# EAGLE board dc_adapter (EAGLE 6.2)
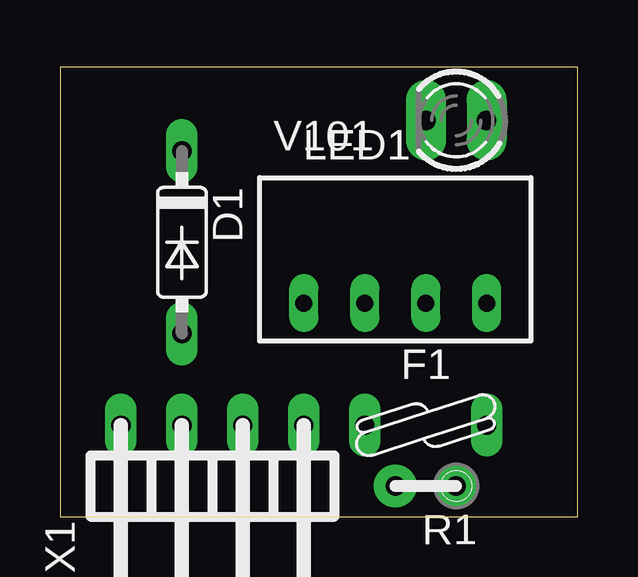
[diagram p0: board, top side]
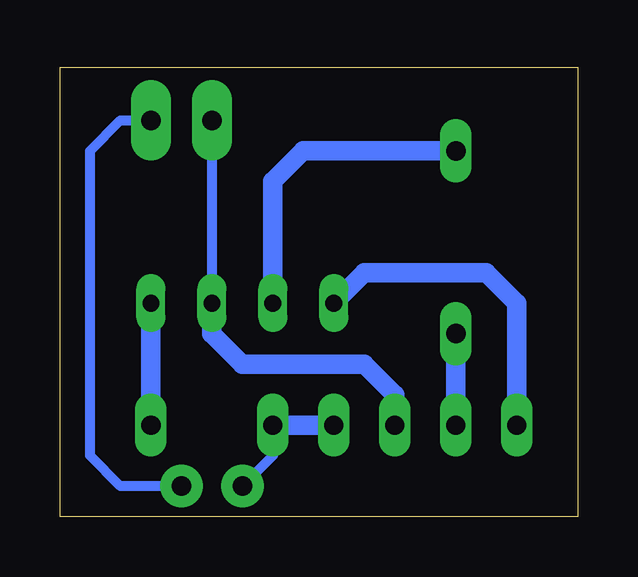
[diagram p1: board, bottom side, seen from below]

Size 21.57 x 18.72 mm. Coordinates in mm from the lower left corner, seen from the top.
Outline: 0,0 21.57,0 21.57,18.72 0,18.72 0,0
Copper layers (1*16): Top 0.035mm / dielectric 1.5mm / Bottom 0.035mm
Design rules: minimum track width 10mil, minimum drill 24mil, track to track 8mil, track to pad 8mil, pad to pad 8mil, via to via 8mil, smd to smd 8mil, copper to edge 40mil, drill to drill 8mil, minimum pad ring 10mil, minimum via ring 8mil, stop-mask expansion 4mil, vias tented up to drill 0mil, thermal gap 10mil

## Footprints (pad centres in the part's own frame; a part is rotated, then mirrored left to right if it is on the bottom)
DO35-7 = drill 0.813 long: A 3.81,0; C -3.81,0
LP60-020 = drill 0.8 long: P$1 -2.54,0; P$2 2.54,0
LED3MM = drill 0.813 pad 1.676 long: A -1.27,0; K 1.27,0
0204V = drill 0.813 pad 1.778: 1 -1.27,0; 2 1.27,0
TME-24V = drill 0.7 pad 1.1 long: 1 -3.81,0; 2 -1.27,0; 3 1.27,0; 4 3.81,0
STG4 = drill 0.8 long: 1 -3.81,5.08; 2 -1.27,5.08; 3 1.27,5.08; 4 3.81,5.08

## Placement (x,y rotation side)
D1  [DO35-7]  5.08,11.43 270 top
F1  LP60-020  [LP60-020]  15.24,3.81 0 top
LED1  [LED3MM]  16.51,16.51 180 top
R1  390Ω  [0204V]  15.24,1.27 180 top
V101  TME2405S  [TME-24V]  13.97,8.89 0 top
X1  [STG4]  6.35,-1.27 0 top

## Library data of the parts
D1 = diode
F1 = sicherung
LED1 = led
R1 = passiv
V101 = schaltregler; MPN: TME 2405S; OC_FARNELL: 1007547; OC_NEWARK: 51R5329
X1 = anschluss

## Nets
N$1: V101.1 X1.1
N$2: D1.C V101.2
N$3: D1.A X1.2
N$4: F1.P$2 V101.4
N$5: LED1.K V101.3 X1.3
N$6: LED1.A R1.1
N$7: F1.P$1 R1.2 X1.4

## Tracks (layer width: path | path; a pad name or v marks a point on that pad's centre or on a via)
N$1
  Bottom 0.813: X1.1 2.54,8.89 3.81,10.16 8.89,10.16 V101.1
N$2
  Bottom 0.813: D1.C 11.43,15.24 12.7,13.97 V101.2
N$3
  Bottom 0.813: X1.2 D1.A
N$4
  Bottom 0.813: F1.P$2 V101.4
N$5
  Bottom 0.406: LED1.K V101.3
  Bottom 0.813: X1.3 7.62,5.08 8.89,6.35 13.97,6.35 15.24,7.62 V101.3
N$6
  Bottom 0.406: R1.1 19.05,1.27 20.32,2.54 20.32,15.24 19.05,16.51 LED1.A
N$7
  Bottom 0.406: F1.P$1 12.7,2.54 R1.2
  Bottom 0.813: X1.4 F1.P$1